# Altium PCB main.PcbDoc (part 9 of 16)
Units mil, origin at the board's own origin, x right, y up, seen from the top; angles counter-clockwise.
Board outline 8394.75 x 5164.44 mil, 7 copper layers (Top Layer 1, Layer 2, Layer 3, Unused, Layer 4_pow, Layer 5_gnd, Bottom 6+gnd), stack 64.043 mil thick; 364 components, 409 nets, 1932 pads, 1061 vias.
Unrouted connection lines stored in the file: 2.
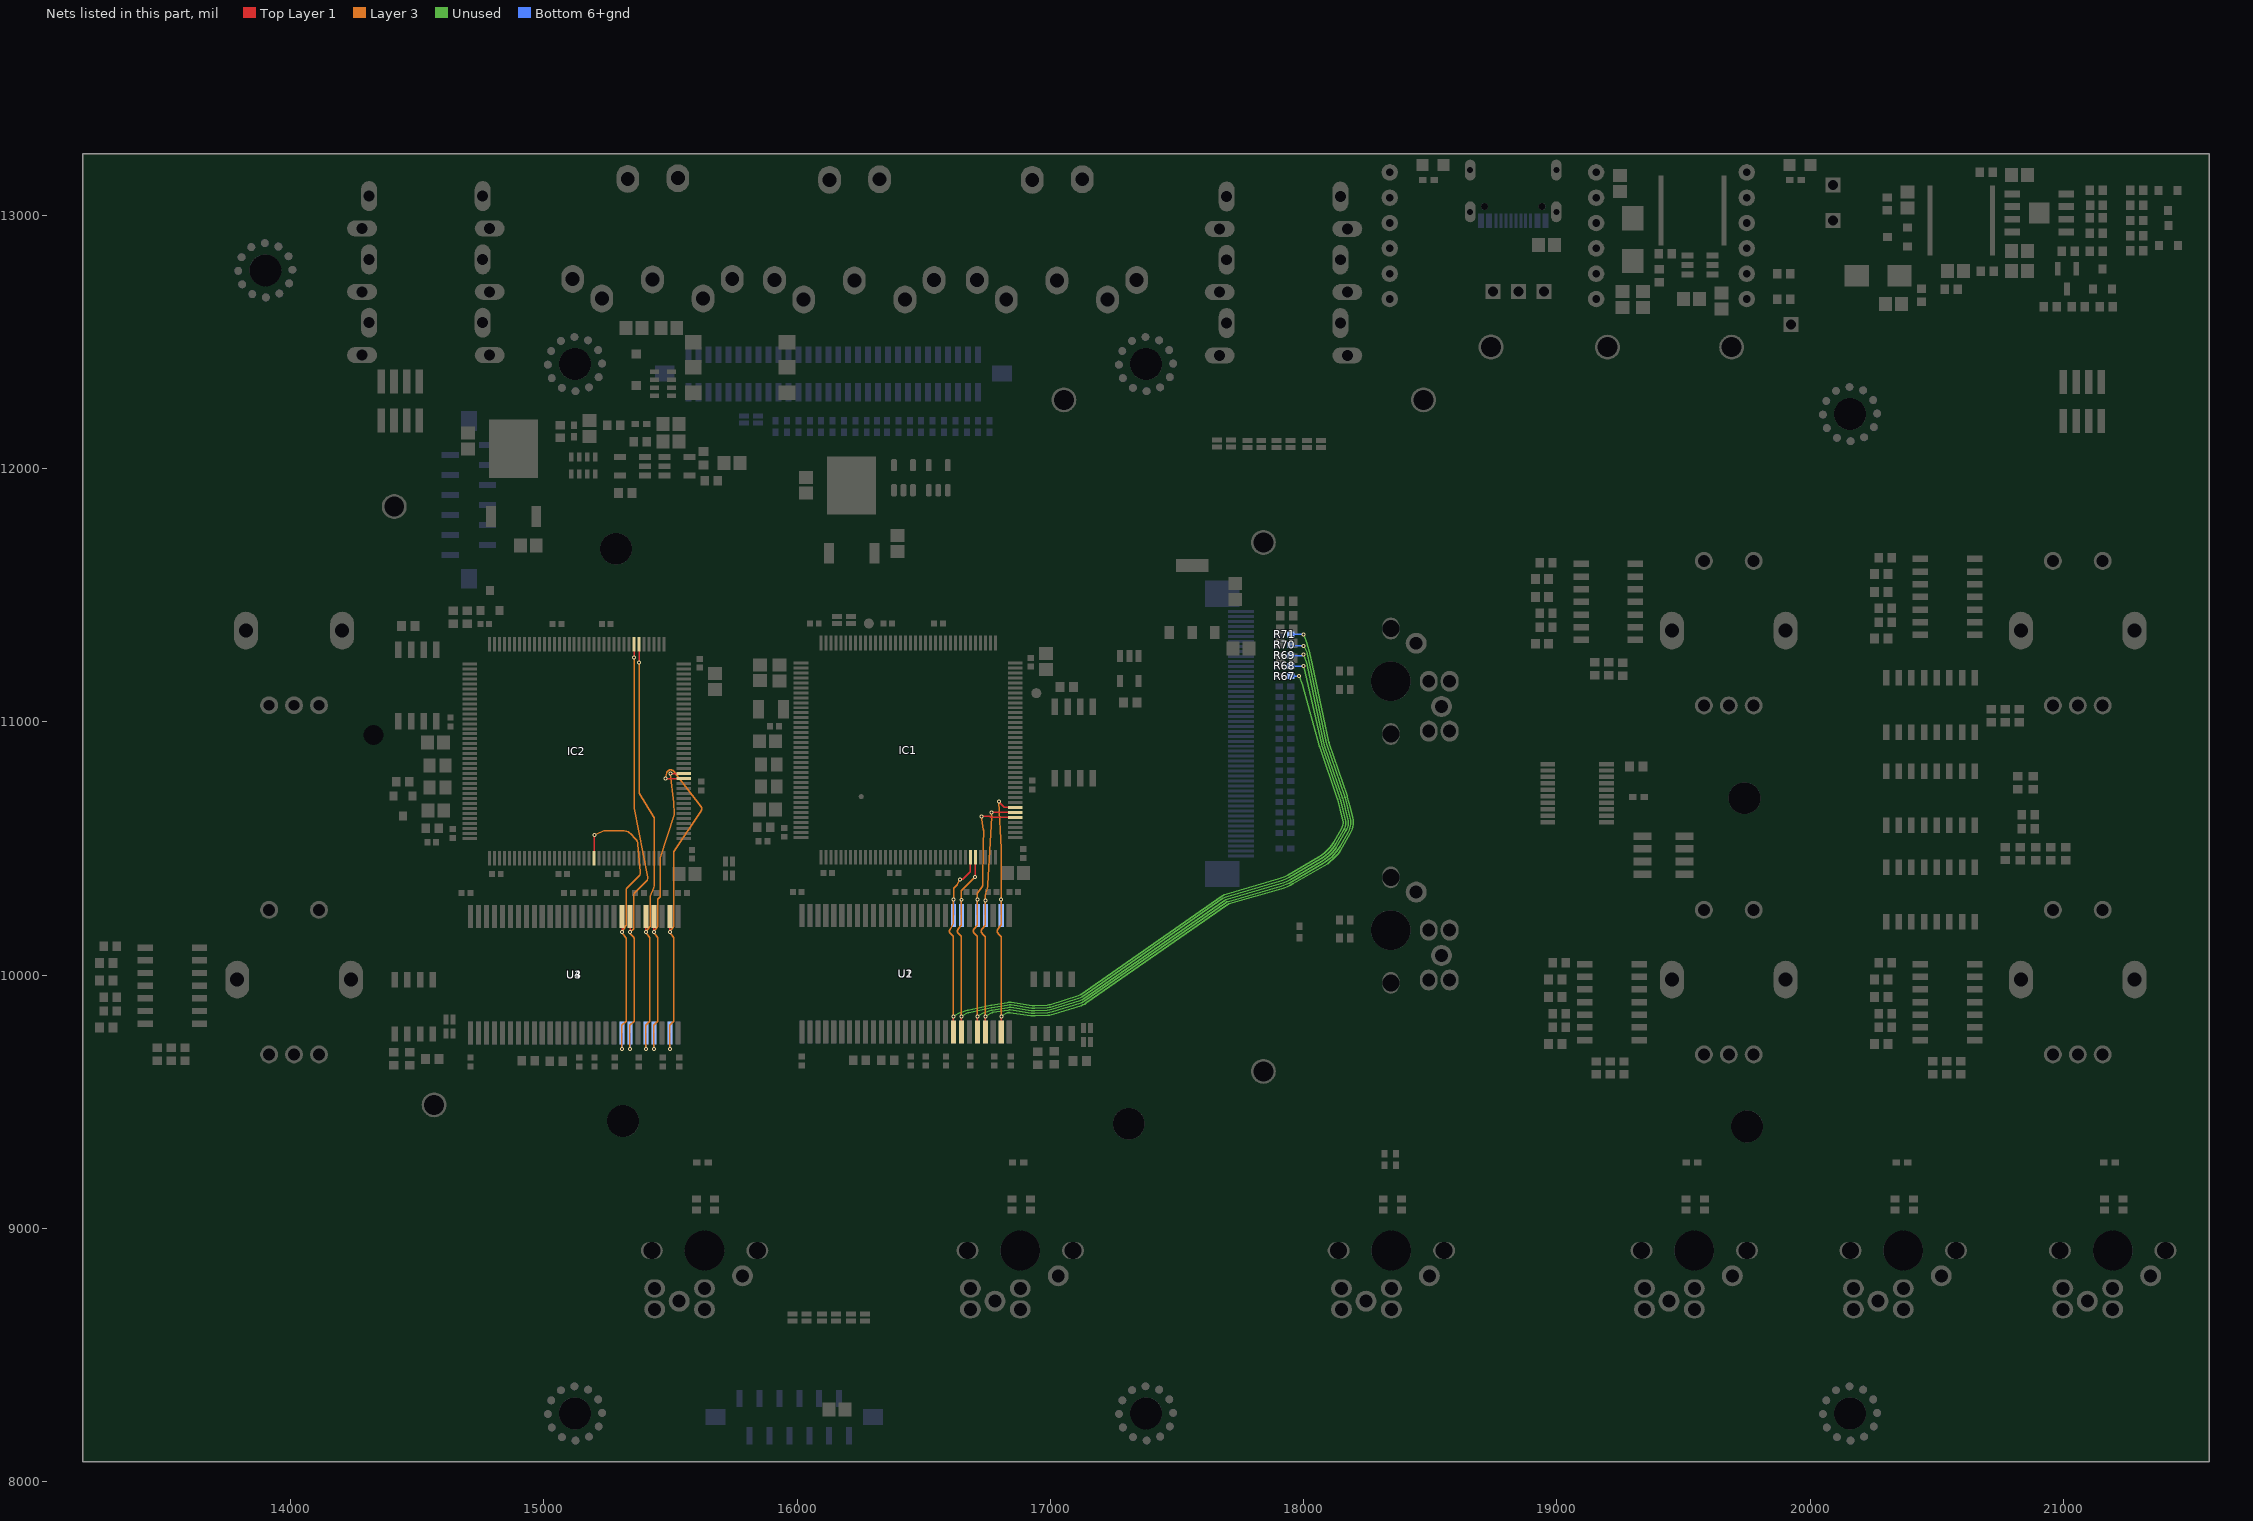
[diagram p12: the nets of this part, all layers, seen from the top]

## Via types
v1: diameter 15.75, hole 7.87, Top Layer 1 to Bottom 6+gnd, tented both sides, 961 vias
v2: diameter 27.56, hole 11.81, Top Layer 1 to Bottom 6+gnd, 45 vias
v3: diameter 23.62/23.62/23.62/23.62/23.62/23.62/23.62 (per signal layer), hole 12, Top Layer 1 to Bottom 6+gnd, tented top, 42 vias
v4: diameter 15.75, hole 7.87, Top Layer 1 to Bottom 6+gnd, 10 vias
v5: diameter 23.62/23.62/23.62/23.62/23.62/23.62/23.62 (per signal layer), hole 12, Top Layer 1 to Bottom 6+gnd, tented bottom, 3 vias

## Nets (pads, with @x,y where several pads share a name; then routed paths per layer and width w, separated by ;. In a path a pad name is that pad's centre, name@x,y a point inside that pad or via, vN(x,y) a via of type N, cw(c..) or ccw(c..) an arc to the next point about the centre after c; other vN are vias at no path point) (continued)
D11: IC1.67 R67.2 U1.47 U2.47 | length 3725.4
  Top Layer 1 w5: U1.47@16617.13,9775.59 16617.37,9818.09 v1(16617.37,9837.68) ; v1(16643.15,10378.82) 16653.55,10378.82 16684.21,10409.48 IC1.67@16684.21,10466.06
  Unused w5: v1(16617.37,9837.68) 16618.85,9839.15 cw(c16622.37,9835.6) 16620.07,9840.04 16641.76,9851.31 cw(c16648.87,9837.68) 16643.99,9852.26 16672.31,9861.74 cw(c16680.36,9837.68) 16675.04,9862.48 16765.25,9882.02 cw(c16774.85,9837.68) 16767.65,9882.48 16829.02,9892.34 cw(c16837.84,9837.68) 16846.13,9892.43 16928.12,9879.84 ccw(c16935.11,9924.67) 16937.4,9879.35 16987.49,9881.89 ccw(c16985.24,9927.2) 16998.61,9883.85 17109.14,9918.14 ccw(c17098.03,9953.96) 17119.43,9923.16 17675.87,10311.29 cw(c17710.04,10262.58) 17693.51,10319.73 17902.31,10380.15 ccw(c17859.4,10529.09) 17937.38,10395.13 18061.88,10467.79 ccw(c17983.57,10601.98) 18118.33,10524.65 18149.88,10579.6 ccw(c18110.55,10602.23) 18154.66,10612.87 18144.91,10653.24 ccw(c18100.81,10642.59) 18144.73,10653.98 18134.52,10693.19 ccw(c18090.6,10681.8) 18133.46,10696.69 18063.26,10901.68 cw(c18141.73,10928.53) 18061.72,10906.72 17997.29,11143.07 ccw(c17982.46,11139.03) 17996.74,11144.72 v1(17982.46,11180.61)
  Layer 3 w5: v1(16617.37,9837.68) 16617.37,10149.87 ; 16631.93,10357.37 v1(16643.15,10378.82) ; 16603.9,10182.37 ccw(c16616.88,10174.13) 16606.03,10163.24 ; 16603.9,10182.37 ccw(c16616.88,10174.13) 16606.03,10163.24 ; 16603.9,10182.37 ccw(c16616.88,10174.13) 16606.03,10163.24 ; 16603.9,10182.37 ccw(c16616.88,10174.13) 16606.03,10163.24 ; 16603.9,10182.37 ccw(c16616.88,10174.13) 16606.03,10163.24 ; 16603.9,10182.37 ccw(c16616.88,10174.13) 16606.03,10163.24 ; 16603.9,10182.37 ccw(c16616.88,10174.13) 16606.03,10163.24 ; 16603.9,10182.37 ccw(c16616.88,10174.13) 16606.03,10163.24 ; 16603.9,10182.37 ccw(c16616.88,10174.13) 16606.03,10163.24 ; 16603.9,10182.37 ccw(c16616.88,10174.13) 16606.03,10163.24 ; 16603.9,10182.37 ccw(c16616.88,10174.13) 16606.03,10163.24 ; 16603.9,10182.37 ccw(c16616.88,10174.13) 16606.03,10163.24 ; 16603.9,10182.37 ccw(c16616.88,10174.13) 16606.03,10163.24 ; 16603.9,10182.37 ccw(c16616.88,10174.13) 16606.03,10163.24 ; 16603.9,10182.37 ccw(c16616.88,10174.13) 16606.03,10163.24 ; 16603.9,10182.37 ccw(c16616.88,10174.13) 16606.03,10163.24 ; 16603.9,10182.37 16616.6,10202.39 ; 16606.03,10163.24 16615.92,10153.31 ; 16615.92,10153.31 cw(c16612.37,10149.78) 16617.37,10149.87 ; 16615.92,10153.31 cw(c16612.37,10149.78) 16617.37,10149.87 ; 16615.92,10153.31 cw(c16612.37,10149.78) 16617.37,10149.87 ; 16615.92,10153.31 cw(c16612.37,10149.78) 16617.37,10149.87 ; 16615.92,10153.31 cw(c16612.37,10149.78) 16617.37,10149.87 ; 16615.92,10153.31 cw(c16612.37,10149.78) 16617.37,10149.87 ; 16615.92,10153.31 cw(c16612.37,10149.78) 16617.37,10149.87 ; 16615.92,10153.31 cw(c16612.37,10149.78) 16617.37,10149.87 ; 16615.92,10153.31 cw(c16612.37,10149.78) 16617.37,10149.87 ; 16615.92,10153.31 cw(c16612.37,10149.78) 16617.37,10149.87 ; 16615.92,10153.31 cw(c16612.37,10149.78) 16617.37,10149.87 ; 16615.92,10153.31 cw(c16612.37,10149.78) 16617.37,10149.87 ; 16615.92,10153.31 cw(c16612.37,10149.78) 16617.37,10149.87 ; 16615.92,10153.31 cw(c16612.37,10149.78) 16617.37,10149.87 ; 16615.92,10153.31 cw(c16612.37,10149.78) 16617.37,10149.87 ; 16615.92,10153.31 cw(c16612.37,10149.78) 16617.37,10149.87 ; 16616.59,10202.39 ccw(c16612.37,10205.07) 16617.37,10204.98 ; 16616.59,10202.39 ccw(c16612.37,10205.07) 16617.37,10204.98 ; 16616.59,10202.39 ccw(c16612.37,10205.07) 16617.37,10204.98 ; 16616.59,10202.39 ccw(c16612.37,10205.07) 16617.37,10204.98 ; 16616.59,10202.39 ccw(c16612.37,10205.07) 16617.37,10204.98 ; 16617.37,10204.98 16617.37,10297.78 v1(16617.88,10298.28) 16617.88,10340.27 ; 16617.88,10340.27 cw(c16622.88,10340.27) 16619.32,10343.78 ; 16617.88,10340.27 cw(c16622.88,10340.27) 16619.32,10343.78 ; 16617.88,10340.27 cw(c16622.88,10340.27) 16619.32,10343.78 ; 16617.88,10340.27 cw(c16622.88,10340.27) 16619.32,10343.78 ; 16617.88,10340.27 cw(c16622.88,10340.27) 16619.32,10343.78 ; 16617.88,10340.27 cw(c16622.88,10340.27) 16619.32,10343.78 ; 16617.88,10340.27 cw(c16622.88,10340.27) 16619.32,10343.78 ; 16617.88,10340.27 cw(c16622.88,10340.27) 16619.32,10343.78 ; 16617.88,10340.27 cw(c16622.88,10340.27) 16619.32,10343.78 ; 16617.88,10340.27 cw(c16622.88,10340.27) 16619.32,10343.78 ; 16617.88,10340.27 cw(c16622.88,10340.27) 16619.32,10343.78 ; 16617.88,10340.27 cw(c16622.88,10340.27) 16619.32,10343.78 ; 16617.88,10340.27 cw(c16622.88,10340.27) 16619.32,10343.78 ; 16617.88,10340.27 cw(c16622.88,10340.27) 16619.32,10343.78 ; 16617.88,10340.27 cw(c16622.88,10340.27) 16619.32,10343.78 ; 16617.88,10340.27 cw(c16622.88,10340.27) 16619.32,10343.78 ; 16619.32,10343.78 16629.19,10353.65 ; 16629.19,10353.65 ccw(c16618.3,10364.5) 16631.92,10357.37 ; 16629.19,10353.65 ccw(c16618.3,10364.5) 16631.92,10357.37 ; 16629.19,10353.65 ccw(c16618.3,10364.5) 16631.92,10357.37 ; 16629.19,10353.65 ccw(c16618.3,10364.5) 16631.92,10357.37 ; 16629.19,10353.65 ccw(c16618.3,10364.5) 16631.92,10357.37 ; 16629.19,10353.65 ccw(c16618.3,10364.5) 16631.92,10357.37 ; 16629.19,10353.65 ccw(c16618.3,10364.5) 16631.92,10357.37 ; 16629.19,10353.65 ccw(c16618.3,10364.5) 16631.92,10357.37 ; 16629.19,10353.65 ccw(c16618.3,10364.5) 16631.92,10357.37 ; 16629.19,10353.65 ccw(c16618.3,10364.5) 16631.92,10357.37 ; 16629.19,10353.65 ccw(c16618.3,10364.5) 16631.92,10357.37 ; 16629.19,10353.65 ccw(c16618.3,10364.5) 16631.92,10357.37 ; 16629.19,10353.65 ccw(c16618.3,10364.5) 16631.92,10357.37 ; 16629.19,10353.65 ccw(c16618.3,10364.5) 16631.92,10357.37 ; 16629.19,10353.65 ccw(c16618.3,10364.5) 16631.92,10357.37 ; 16629.19,10353.65 ccw(c16618.3,10364.5) 16631.92,10357.37
  Bottom 6+gnd w5: U2.47@16617.13,10236.22 16617.88,10236.97 v1(16617.88,10298.28) ; R67.2@17948.43,11180.61 v1(17982.46,11180.61)
D12: IC1.68 R68.2 U1.48 U2.48 | length 3532
  Top Layer 1 w5: U1.48@16648.62,9775.59 16648.87,9818.09 v1(16648.87,9837.68) ; v1(16703.15,10388.82) 16703.52,10389.19 16703.52,10465.37 IC1.68@16703.78,10465.63
  Unused w5: v1(16648.87,9837.68) 16650.58,9839.17 cw(c16653.87,9835.4) 16651.52,9839.82 16673.14,9851.25 16673.25,9851.31 cw(c16680.36,9837.68) 16677.11,9852.7 16767.33,9872.24 cw(c16774.85,9837.68) 16769.24,9872.6 16830.64,9882.48 cw(c16837.84,9837.68) 16844.77,9882.52 16926.6,9869.95 ccw(c16935.11,9924.67) 16937.91,9869.37 16988,9871.9 ccw(c16985.24,9927.2) 17001.6,9874.31 17112.11,9908.59 ccw(c17098.03,9953.96) 17125.22,9915.01 17681.54,10303.05 cw(c17710.04,10262.58) 17696.28,10310.13 17905.13,10370.55 ccw(c17859.4,10529.09) 17942.42,10386.5 18066.92,10459.15 ccw(c17983.57,10601.98) 18127.01,10519.68 18158.55,10574.61 ccw(c18110.55,10602.23) 18164.38,10615.22 18154.63,10655.59 ccw(c18100.81,10642.59) 18154.41,10656.5 18144.19,10695.75 ccw(c18090.6,10681.8) 18142.92,10699.92 18072.71,10904.95 cw(c18141.73,10928.53) 18070.66,10912.15 v1(17999.57,11220.71)
  Layer 3 w5: v1(16648.87,9837.68) 16648.87,10149.83 ; v1(16703.15,10388.82) 16649.82,10335.49 ; 16636.86,10184.32 ccw(c16648.38,10174.13) 16637.5,10163.26 ; 16636.86,10184.32 ccw(c16648.38,10174.13) 16637.5,10163.26 ; 16636.86,10184.32 ccw(c16648.38,10174.13) 16637.51,10163.26 ; 16636.86,10184.32 ccw(c16648.38,10174.13) 16637.51,10163.26 ; 16636.86,10184.32 ccw(c16648.38,10174.13) 16637.51,10163.26 ; 16636.86,10184.32 ccw(c16648.38,10174.13) 16637.51,10163.26 ; 16636.86,10184.32 16647.61,10196.48 ; 16637.51,10163.26 16647.4,10153.36 ; 16647.4,10153.36 cw(c16643.87,10149.83) 16648.87,10149.86 ; 16647.4,10153.36 cw(c16643.87,10149.83) 16648.87,10149.86 ; 16647.4,10153.36 cw(c16643.87,10149.83) 16648.87,10149.86 ; 16647.4,10153.36 cw(c16643.87,10149.83) 16648.87,10149.86 ; 16647.4,10153.36 cw(c16643.87,10149.83) 16648.87,10149.86 ; 16647.4,10153.36 cw(c16643.87,10149.83) 16648.87,10149.86 ; 16647.4,10153.36 cw(c16643.87,10149.83) 16648.87,10149.86 ; 16647.4,10153.36 cw(c16643.87,10149.83) 16648.87,10149.86 ; 16647.4,10153.36 cw(c16643.87,10149.83) 16648.87,10149.86 ; 16647.4,10153.36 cw(c16643.87,10149.83) 16648.87,10149.86 ; 16647.4,10153.36 cw(c16643.87,10149.83) 16648.87,10149.86 ; 16647.4,10153.36 cw(c16643.87,10149.83) 16648.87,10149.86 ; 16647.4,10153.36 cw(c16643.87,10149.83) 16648.87,10149.86 ; 16647.4,10153.36 cw(c16643.87,10149.83) 16648.87,10149.86 ; 16647.4,10153.36 cw(c16643.87,10149.83) 16648.87,10149.86 ; 16647.4,10153.36 cw(c16643.87,10149.83) 16648.87,10149.86 ; 16647.61,10196.48 ccw(c16643.87,10199.79) 16648.87,10199.7 ; 16647.61,10196.48 ccw(c16643.87,10199.79) 16648.87,10199.7 ; 16647.61,10196.48 ccw(c16643.87,10199.79) 16648.87,10199.7 ; 16647.61,10196.48 ccw(c16643.87,10199.79) 16648.87,10199.7 ; 16647.61,10196.48 ccw(c16643.87,10199.79) 16648.87,10199.7 ; 16647.61,10196.48 ccw(c16643.87,10199.79) 16648.87,10199.7 ; 16647.61,10196.48 ccw(c16643.87,10199.79) 16648.87,10199.7 ; 16647.61,10196.48 ccw(c16643.87,10199.79) 16648.87,10199.7 ; 16647.61,10196.48 ccw(c16643.87,10199.79) 16648.87,10199.7 ; 16647.61,10196.48 ccw(c16643.87,10199.79) 16648.87,10199.7 ; 16647.61,10196.48 ccw(c16643.87,10199.79) 16648.87,10199.7 ; 16647.61,10196.48 ccw(c16643.87,10199.79) 16648.87,10199.7 ; 16647.61,10196.48 ccw(c16643.87,10199.79) 16648.87,10199.7 ; 16647.61,10196.48 ccw(c16643.87,10199.79) 16648.87,10199.7 ; 16647.61,10196.48 ccw(c16643.87,10199.79) 16648.87,10199.7 ; 16647.61,10196.48 ccw(c16643.87,10199.79) 16648.87,10199.7 ; 16648.38,10331.97 cw(c16653.38,10331.97) 16649.82,10335.49 ; 16648.38,10331.97 cw(c16653.38,10331.97) 16649.82,10335.49 ; 16648.38,10331.97 cw(c16653.38,10331.97) 16649.82,10335.49 ; 16648.38,10331.97 cw(c16653.38,10331.97) 16649.82,10335.49 ; 16648.38,10331.97 cw(c16653.38,10331.97) 16649.82,10335.49 ; 16648.38,10331.97 cw(c16653.38,10331.97) 16649.82,10335.49 ; 16648.38,10331.97 cw(c16653.38,10331.97) 16649.82,10335.49 ; 16648.38,10331.97 cw(c16653.38,10331.97) 16649.82,10335.49 ; 16648.38,10331.97 cw(c16653.38,10331.97) 16649.82,10335.49 ; 16648.38,10331.97 cw(c16653.38,10331.97) 16649.82,10335.49 ; 16648.38,10331.97 cw(c16653.38,10331.97) 16649.82,10335.49 ; 16648.38,10331.97 cw(c16653.38,10331.97) 16649.82,10335.49 ; 16648.38,10331.97 cw(c16653.38,10331.97) 16649.82,10335.49 ; 16648.38,10331.97 cw(c16653.38,10331.97) 16649.82,10335.49 ; 16648.38,10331.97 cw(c16653.38,10331.97) 16649.82,10335.49 ; 16648.38,10331.97 cw(c16653.38,10331.97) 16649.82,10335.49 ; 16648.38,10331.97 16648.38,10298.31 v1(16648.63,10298.06) 16648.87,10297.82 16648.87,10199.7
  Bottom 6+gnd w5: U2.48@16648.62,10236.22 v1(16648.63,10298.06) ; R68.2@17947.32,11220.81 17948.42,11220.8 17960.69,11220.71 v1(17999.57,11220.71)
D13: IC1.77 R69.2 U1.50 U2.50 | length 3878.8
  Top Layer 1 w5: U1.50@16711.86,9775.83 16711.86,9818.09 v1(16711.86,9837.68) ; v1(16727.71,10626.89) 16761.65,10626.89 16765.47,10623.07 IC1.77@16860.91,10623.07
  Unused w5: v1(16711.86,9837.68) 16713.44,9839.18 cw(c16716.86,9835.53) 16714.54,9839.96 16736.27,9851.32 cw(c16743.36,9837.68) 16738.48,9852.25 16766.8,9861.74 cw(c16774.85,9837.68) 16770.85,9862.73 16832.23,9872.6 cw(c16837.84,9837.68) 16843.28,9872.63 16925.1,9860.07 ccw(c16935.11,9924.67) 16938.41,9859.38 16988.5,9861.91 ccw(c16985.24,9927.2) 17004.57,9864.75 17115.07,9899.04 ccw(c17098.03,9953.96) 17130.92,9906.79 17687.26,10294.84 cw(c17710.04,10262.58) 17699.06,10300.52 17907.95,10360.96 ccw(c17859.4,10529.09) 17947.46,10377.86 18071.96,10450.52 ccw(c17983.57,10601.98) 18135.65,10514.66 18167.22,10569.63 ccw(c18110.55,10602.23) 18174.1,10617.57 18164.37,10657.89 ccw(c18100.81,10642.59) 18164.08,10659.04 18153.86,10698.27 ccw(c18090.6,10681.8) 18152.39,10703.14 18082.18,10908.16 cw(c18141.73,10928.53) 18080.17,10915.44 18014.62,11223.83 ccw(c17999.57,11220.71) 18014.02,11225.96 v1(17999.57,11265.71)
  Layer 3 w5: 16700.47,10163.29 cw(c16711.37,10174.13) 16699.85,10184.31 16710.61,10196.48 ; 16700.48,10163.28 16710.4,10153.31 ; v1(16711.86,9837.68) 16711.86,10149.87 ; v1(16727.71,10626.89) 16731.7,10602.04 ; 16731.7,10602 16735.97,10574.16 ; 16735.61,10516.87 16733.52,10358.62 ; 16735.61,10516.89 16736.26,10570 ; 16710.4,10153.31 cw(c16706.86,10149.78) 16711.86,10149.87 ; 16710.4,10153.31 cw(c16706.86,10149.78) 16711.86,10149.87 ; 16710.4,10153.31 cw(c16706.86,10149.78) 16711.86,10149.87 ; 16710.4,10153.31 cw(c16706.86,10149.78) 16711.86,10149.87 ; 16710.4,10153.31 cw(c16706.86,10149.78) 16711.86,10149.87 ; 16710.4,10153.31 cw(c16706.86,10149.78) 16711.86,10149.87 ; 16710.4,10153.31 cw(c16706.86,10149.78) 16711.86,10149.87 ; 16710.4,10153.31 cw(c16706.86,10149.78) 16711.86,10149.87 ; 16710.4,10153.31 cw(c16706.86,10149.78) 16711.86,10149.87 ; 16710.4,10153.31 cw(c16706.86,10149.78) 16711.86,10149.87 ; 16710.4,10153.31 cw(c16706.86,10149.78) 16711.86,10149.87 ; 16710.4,10153.31 cw(c16706.86,10149.78) 16711.86,10149.87 ; 16710.4,10153.31 cw(c16706.86,10149.78) 16711.86,10149.87 ; 16710.4,10153.31 cw(c16706.86,10149.78) 16711.86,10149.87 ; 16710.4,10153.31 cw(c16706.86,10149.78) 16711.86,10149.87 ; 16710.4,10153.31 cw(c16706.86,10149.78) 16711.86,10149.87 ; 16710.61,10196.48 ccw(c16706.86,10199.79) 16711.86,10199.7 ; 16710.61,10196.48 ccw(c16706.86,10199.79) 16711.86,10199.7 ; 16710.61,10196.48 ccw(c16706.86,10199.79) 16711.86,10199.7 ; 16710.61,10196.48 ccw(c16706.86,10199.79) 16711.86,10199.7 ; 16710.61,10196.48 ccw(c16706.86,10199.79) 16711.86,10199.7 ; 16710.61,10196.48 ccw(c16706.86,10199.79) 16711.86,10199.7 ; 16710.61,10196.48 ccw(c16706.86,10199.79) 16711.86,10199.7 ; 16710.61,10196.48 ccw(c16706.86,10199.79) 16711.86,10199.7 ; 16710.61,10196.48 ccw(c16706.86,10199.79) 16711.86,10199.7 ; 16710.61,10196.48 ccw(c16706.86,10199.79) 16711.86,10199.7 ; 16710.61,10196.48 ccw(c16706.86,10199.79) 16711.86,10199.7 ; 16710.61,10196.48 ccw(c16706.86,10199.79) 16711.86,10199.7 ; 16710.61,10196.48 ccw(c16706.86,10199.79) 16711.86,10199.7 ; 16710.61,10196.48 ccw(c16706.86,10199.79) 16711.86,10199.7 ; 16710.61,10196.48 ccw(c16706.86,10199.79) 16711.86,10199.7 ; 16710.61,10196.48 ccw(c16706.86,10199.79) 16711.86,10199.7 ; 16711.37,10319.97 cw(c16716.37,10319.97) 16712.24,10322.78 ; 16711.37,10319.97 cw(c16716.37,10319.97) 16712.24,10322.78 ; 16711.37,10319.97 cw(c16716.37,10319.97) 16712.24,10322.78 ; 16711.37,10319.97 cw(c16716.37,10319.97) 16712.24,10322.78 ; 16711.37,10319.97 cw(c16716.37,10319.97) 16712.24,10322.78 ; 16711.37,10319.97 cw(c16716.37,10319.97) 16712.24,10322.78 ; 16711.37,10319.97 cw(c16716.37,10319.97) 16712.24,10322.78 ; 16711.37,10319.97 cw(c16716.37,10319.97) 16712.24,10322.78 ; 16711.37,10319.97 cw(c16716.37,10319.97) 16712.24,10322.78 ; 16711.37,10319.97 cw(c16716.37,10319.97) 16712.24,10322.78 ; 16711.37,10319.97 cw(c16716.37,10319.97) 16712.24,10322.78 ; 16711.37,10319.97 cw(c16716.37,10319.97) 16712.24,10322.78 ; 16711.37,10319.97 cw(c16716.37,10319.97) 16712.24,10322.78 ; 16711.37,10319.97 cw(c16716.37,10319.97) 16712.24,10322.78 ; 16711.37,10319.97 cw(c16716.37,10319.97) 16712.24,10322.78 ; 16711.37,10319.97 cw(c16716.37,10319.97) 16712.24,10322.78 ; 16711.37,10319.97 v1(16711.37,10298.31) 16711.86,10297.82 16711.86,10199.7 ; 16712.24,10322.78 16730.86,10350.17 ; 16730.86,10350.17 ccw(c16718.15,10358.82) 16733.52,10358.62 ; 16730.86,10350.17 ccw(c16718.15,10358.82) 16733.52,10358.62 ; 16730.86,10350.17 ccw(c16718.15,10358.82) 16733.52,10358.62 ; 16730.86,10350.17 ccw(c16718.15,10358.82) 16733.52,10358.62 ; 16730.86,10350.17 ccw(c16718.15,10358.82) 16733.52,10358.62 ; 16730.86,10350.17 ccw(c16718.15,10358.82) 16733.52,10358.62 ; 16730.86,10350.17 ccw(c16718.15,10358.82) 16733.52,10358.62 ; 16730.86,10350.17 ccw(c16718.15,10358.82) 16733.52,10358.62 ; 16730.86,10350.17 ccw(c16718.15,10358.82) 16733.52,10358.62 ; 16730.86,10350.17 ccw(c16718.15,10358.82) 16733.52,10358.62 ; 16730.86,10350.17 ccw(c16718.15,10358.82) 16733.52,10358.62 ; 16730.86,10350.17 ccw(c16718.15,10358.82) 16733.52,10358.62 ; 16730.86,10350.17 ccw(c16718.15,10358.82) 16733.52,10358.62 ; 16730.86,10350.17 ccw(c16718.15,10358.82) 16733.52,10358.62 ; 16730.86,10350.17 ccw(c16718.15,10358.82) 16733.52,10358.62 ; 16730.86,10350.17 ccw(c16718.15,10358.82) 16733.52,10358.62 ; 16735.97,10574.16 cw(c16710.89,10570.31) 16736.26,10570 ; 16735.97,10574.16 cw(c16710.89,10570.31) 16736.26,10570 ; 16735.97,10574.16 cw(c16710.89,10570.31) 16736.26,10570 ; 16735.97,10574.16 cw(c16710.89,10570.31) 16736.26,10570 ; 16735.97,10574.16 cw(c16710.89,10570.31) 16736.26,10570 ; 16735.97,10574.16 cw(c16710.89,10570.31) 16736.26,10570 ; 16735.97,10574.16 cw(c16710.89,10570.31) 16736.26,10570 ; 16735.97,10574.16 cw(c16710.89,10570.31) 16736.26,10570 ; 16735.97,10574.16 cw(c16710.89,10570.31) 16736.26,10570 ; 16735.97,10574.16 cw(c16710.89,10570.31) 16736.26,10570 ; 16735.97,10574.16 cw(c16710.89,10570.31) 16736.26,10570 ; 16735.97,10574.16 cw(c16710.89,10570.31) 16736.26,10570 ; 16735.97,10574.16 cw(c16710.89,10570.31) 16736.26,10570 ; 16735.97,10574.16 cw(c16710.89,10570.31) 16736.26,10570 ; 16735.97,10574.16 cw(c16710.89,10570.31) 16736.26,10570 ; 16735.97,10574.16 cw(c16710.89,10570.31) 16736.26,10570
  Bottom 6+gnd w5: U2.50@16711.61,10236.22 v1@16711.61,10298.06 ; R69.2@17947.32,11262.13 17993.08,11262.13 17996.66,11265.71 v1(17999.57,11265.71)
D14: IC1.78 R70.2 U1.51 U2.51 | length 3508.4
  Top Layer 1 w5: U1.51@16743.36,9775.83 v1(16743.36,9837.68) ; v1(16767.21,10643.47) 16767.57,10643.11 16834.37,10643.11 16834.37,10643.46 IC1.78@16860.75,10642.6
  Unused w5: v1(16743.36,9837.68) 16744.94,9839.18 cw(c16748.36,9835.53) 16746.04,9839.96 16767.76,9851.31 cw(c16774.85,9837.68) 16772.47,9852.87 16833.82,9862.73 cw(c16837.84,9837.68) 16841.77,9862.74 16923.61,9850.18 ccw(c16935.11,9924.67) 16938.92,9849.39 16989.04,9851.93 ccw(c16985.24,9927.2) 17007.53,9855.2 17118.03,9889.49 ccw(c17098.03,9953.96) 17136.62,9898.57 17693.31,10286.87 cw(c17710.04,10262.58) 17701.84,10290.92 17910.77,10351.36 ccw(c17859.4,10529.09) 17952.5,10369.22 18077,10441.88 ccw(c17983.57,10601.98) 18144.33,10509.68 18175.89,10564.65 ccw(c18110.55,10602.23) 18183.82,10619.91 18174.09,10660.23 ccw(c18100.81,10642.59) 18173.76,10661.54 18163.54,10700.79 ccw(c18090.6,10681.8) 18161.87,10706.33 18091.65,10911.38 cw(c18141.73,10928.53) 18089.95,10917.52 18024.4,11225.93 ccw(c17999.57,11220.71) 18024.31,11226.35 18014.56,11269.13 ccw(c17999.57,11265.71) 18013.38,11272.46 v1(17999.57,11300.71)
  Layer 3 w5: v1(16743.36,9837.68) 16743.36,10149.87 ccw(c16738.36,10149.78) 16741.9,10153.31 16731.97,10163.28 cw(c16742.87,10174.13) 16731.34,10184.31 16742.1,10196.48 ccw(c16738.36,10199.79) 16743.36,10199.7 v1(16743.36,10294.41) 16743.36,10315.33 cw(c16748.36,10315.33) 16743.52,10316.61 16752.33,10349.72 ccw(c16718.15,10358.82) 16753.46,10356.77 16769.03,10625.55 16769.03,10625.6 ccw(c16764.03,10625.81) 16769,10626.34 v1(16767.21,10643.47)
  Bottom 6+gnd w5: U2.51@16743.11,10236.22 16743.36,10236.47 v1(16743.36,10294.41) ; R70.2@17950.25,11300.71 v1(17999.57,11300.71)
D15: IC1.79 R71.2 U1.53 U2.53 | length 3643.4
  Top Layer 1 w5: v1(16796.99,10685.43) 16796.99,10684.05 16818.44,10662.59 16860.76,10662.59 IC1.79@16860.91,10662.44 ; U1.53@16806.1,9775.59 16806.35,9818.09 v1(16806.35,9837.68)
  Unused w5: v1(16806.35,9837.68) 16807.83,9839.15 cw(c16811.35,9835.6) 16809.04,9840.04 16830.73,9851.31 cw(c16837.84,9837.68) 16840.25,9852.86 16922.13,9840.29 ccw(c16935.11,9924.67) 16939.4,9839.4 16989.55,9841.94 ccw(c16985.24,9927.2) 17010.48,9845.65 17121,9879.94 ccw(c17098.03,9953.96) 17142.34,9890.37 17699.02,10278.66 cw(c17710.04,10262.58) 17704.62,10281.31 17913.6,10341.77 ccw(c17859.4,10529.09) 17957.54,10360.59 18082.04,10433.24 ccw(c17983.57,10601.98) 18153,10504.7 18184.56,10559.67 ccw(c18110.55,10602.23) 18193.54,10622.26 18183.81,10662.58 ccw(c18100.81,10642.59) 18183.44,10664.05 18173.22,10703.31 ccw(c18090.6,10681.8) 18171.37,10709.46 18101.11,10914.62 cw(c18141.73,10928.53) 18099.73,10919.6 18034.17,11228.06 ccw(c17999.57,11220.71) 18034.06,11228.57 18024.31,11271.35 ccw(c17999.57,11265.71) 18023.88,11272.96 18014.3,11305.1 ccw(c17999.57,11300.71) 18014.02,11305.96 v1(17999.57,11345.71)
  Layer 3 w5: v1(16796.99,10685.43) 16805.85,10499.02 ; v1(16806.35,9837.68) 16806.35,10149.87 ; 16804.89,10153.31 cw(c16801.35,10149.78) 16806.35,10149.87 ; 16804.89,10153.31 cw(c16801.35,10149.78) 16806.35,10149.87 ; 16804.89,10153.31 cw(c16801.35,10149.78) 16806.35,10149.87 ; 16804.89,10153.31 cw(c16801.35,10149.78) 16806.35,10149.87 ; 16804.89,10153.31 cw(c16801.35,10149.78) 16806.35,10149.87 ; 16804.89,10153.31 cw(c16801.35,10149.78) 16806.35,10149.87 ; 16804.89,10153.31 cw(c16801.35,10149.78) 16806.35,10149.87 ; 16804.89,10153.31 cw(c16801.35,10149.78) 16806.35,10149.87 ; 16804.89,10153.31 cw(c16801.35,10149.78) 16806.35,10149.87 ; 16804.89,10153.31 cw(c16801.35,10149.78) 16806.35,10149.87 ; 16804.89,10153.31 cw(c16801.35,10149.78) 16806.35,10149.87 ; 16804.89,10153.31 cw(c16801.35,10149.78) 16806.35,10149.87 ; 16804.89,10153.31 cw(c16801.35,10149.78) 16806.35,10149.87 ; 16804.89,10153.31 cw(c16801.35,10149.78) 16806.35,10149.87 ; 16804.89,10153.31 cw(c16801.35,10149.78) 16806.35,10149.87 ; 16804.89,10153.31 cw(c16801.35,10149.78) 16806.35,10149.87 ; 16804.89,10153.31 16794.96,10163.28 cw(c16805.86,10174.13) 16794.33,10184.31 16805.09,10196.48 ; 16805.09,10196.48 ccw(c16801.35,10199.79) 16806.35,10199.7 ; 16805.09,10196.48 ccw(c16801.35,10199.79) 16806.35,10199.7 ; 16805.09,10196.48 ccw(c16801.35,10199.79) 16806.35,10199.7 ; 16805.09,10196.48 ccw(c16801.35,10199.79) 16806.35,10199.7 ; 16805.09,10196.48 ccw(c16801.35,10199.79) 16806.35,10199.7 ; 16805.09,10196.48 ccw(c16801.35,10199.79) 16806.35,10199.7 ; 16805.09,10196.48 ccw(c16801.35,10199.79) 16806.35,10199.7 ; 16805.09,10196.48 ccw(c16801.35,10199.79) 16806.35,10199.7 ; 16805.09,10196.48 ccw(c16801.35,10199.79) 16806.35,10199.7 ; 16805.09,10196.48 ccw(c16801.35,10199.79) 16806.35,10199.7 ; 16805.09,10196.48 ccw(c16801.35,10199.79) 16806.35,10199.7 ; 16805.09,10196.48 ccw(c16801.35,10199.79) 16806.35,10199.7 ; 16805.09,10196.48 ccw(c16801.35,10199.79) 16806.35,10199.7 ; 16805.09,10196.48 ccw(c16801.35,10199.79) 16806.35,10199.7 ; 16805.09,10196.48 ccw(c16801.35,10199.79) 16806.35,10199.7 ; 16805.09,10196.48 ccw(c16801.35,10199.79) 16806.35,10199.7 ; 16805.86,10498.88 ccw(c16800.86,10498.79) 16805.85,10499.02 ; 16805.86,10498.88 ccw(c16800.86,10498.79) 16805.85,10499.02 ; 16805.86,10498.88 ccw(c16800.86,10498.79) 16805.85,10499.02 ; 16805.86,10498.88 ccw(c16800.86,10498.79) 16805.85,10499.02 ; 16805.86,10498.88 ccw(c16800.86,10498.79) 16805.85,10499.02 ; 16805.86,10498.88 v1(16805.86,10298.31) 16806.35,10297.82 16806.35,10199.7
  Bottom 6+gnd w5: U2.53@16806.1,10236.22 v1@16806.1,10298.06 ; R71.2@17948.26,11345.71 v1(17999.57,11345.71)
DD0: IC2.85 U3.2 U4.2 | length 1485.8
  Top Layer 1 w5: v1@15480.01,10776.36 IC2.85@15552.61,10776.36 ; v1@15497.8,10170.19 U3.2@15497.8,10232.03
  Layer 3 w5: v1(15479.93,10776.28) 15484.91,10798.95 cw(c15499.93,10795.65) 15512.02,10805.15 15620.18,10667.36 cw(c15608.09,10657.87) 15620.89,10649.35 15513.79,10488.43 ccw(c15517.95,10485.66) 15512.95,10485.66 15512.95,10196.31 ; v1(15497.56,9709.31) 15497.56,9803 15513.68,9819.12 15513.68,10145.78 ; 15512.95,10196.27 cw(c15507.95,10196.36) 15512.13,10193.61 15498.38,10172.69 ccw(c15502.56,10169.94) 15497.56,10170 v1(15497.56,10169.94) ccw(c15502.56,10169.94) 15498.61,10166.87 15512.63,10148.8 ; 15512.63,10148.8 cw(c15508.68,10145.74) 15513.68,10145.83 ; 15512.63,10148.8 cw(c15508.68,10145.74) 15513.68,10145.83 ; 15512.63,10148.8 cw(c15508.68,10145.74) 15513.68,10145.83 ; 15512.63,10148.8 cw(c15508.68,10145.74) 15513.68,10145.83 ; 15512.63,10148.8 cw(c15508.68,10145.74) 15513.68,10145.83 ; 15512.63,10148.8 cw(c15508.68,10145.74) 15513.68,10145.83 ; 15512.63,10148.8 cw(c15508.68,10145.74) 15513.68,10145.83 ; 15512.63,10148.8 cw(c15508.68,10145.74) 15513.68,10145.83 ; 15512.63,10148.8 cw(c15508.68,10145.74) 15513.68,10145.83 ; 15512.63,10148.8 cw(c15508.68,10145.74) 15513.68,10145.83 ; 15512.63,10148.8 cw(c15508.68,10145.74) 15513.68,10145.83 ; 15512.63,10148.8 cw(c15508.68,10145.74) 15513.68,10145.83 ; 15512.63,10148.8 cw(c15508.68,10145.74) 15513.68,10145.83 ; 15512.63,10148.8 cw(c15508.68,10145.74) 15513.68,10145.83 ; 15512.63,10148.8 cw(c15508.68,10145.74) 15513.68,10145.83 ; 15512.63,10148.8 cw(c15508.68,10145.74) 15513.68,10145.83
  Bottom 6+gnd w5: v1@15497.8,9709.56 U4.2@15497.8,9771.4
DD1: IC2.86 U3.4 U4.4 | length 1485.1
  Top Layer 1 w5: v1@15434.81,10170.19 U3.4@15434.81,10232.03 ; v1@15500.16,10795.89 IC2.86@15552.45,10795.89
  Layer 3 w5: v1(15434.57,9709.31) 15434.57,9803 15450.69,9819.12 15450.69,10145.78 ; v1(15434.57,10169.94) ccw(c15439.57,10169.94) 15435.62,10166.88 15449.64,10148.8 ; v1@15435.41,10172.73 ccw(c15439.57,10169.94) v1(15434.57,10169.94) ; 15450.69,10197.05 15450.69,10300.48 15458.39,10308.18 ; v1(15499.93,10795.65) 15513.42,10680.61 cw(c15498.15,10678.82) 15513.51,10679.49 15515.29,10638.84 cw(c15499.93,10638.17) 15514.56,10633.47 15460.11,10463.98 ccw(c15464.88,10462.47) 15459.88,10462.5 15459.82,10311.69 ; v1(15434.57,10169.94) cw(c15439.57,10169.94) v1@15435.41,10172.72 ; v1(15434.57,10169.94) cw(c15439.57,10169.94) v1@15435.41,10172.72 ; v1(15434.57,10169.94) cw(c15439.57,10169.94) v1@15435.41,10172.72 ; v1(15434.57,10169.94) cw(c15439.57,10169.94) v1@15435.41,10172.72 ; v1(15434.57,10169.94) cw(c15439.57,10169.94) v1@15435.41,10172.72 ; v1(15434.57,10169.94) cw(c15439.57,10169.94) v1@15435.41,10172.72 ; v1(15434.57,10169.94) cw(c15439.57,10169.94) v1@15435.41,10172.72 ; v1(15434.57,10169.94) cw(c15439.57,10169.94) v1@15435.41,10172.72 ; v1(15434.57,10169.94) cw(c15439.57,10169.94) v1@15435.41,10172.72 ; v1(15434.57,10169.94) cw(c15439.57,10169.94) v1@15435.41,10172.72 ; v1(15434.57,10169.94) cw(c15439.57,10169.94) v1@15435.41,10172.72 ; v1(15434.57,10169.94) cw(c15439.57,10169.94) v1@15435.41,10172.72 ; v1(15434.57,10169.94) cw(c15439.57,10169.94) v1@15435.41,10172.72 ; v1(15434.57,10169.94) cw(c15439.57,10169.94) v1@15435.41,10172.72 ; v1(15434.57,10169.94) cw(c15439.57,10169.94) v1@15435.41,10172.72 ; v1@15435.41,10172.72 15449.85,10194.31 ; 15449.64,10148.8 cw(c15445.69,10145.74) 15450.69,10145.83 ; 15449.64,10148.8 cw(c15445.69,10145.74) 15450.69,10145.83 ; 15449.64,10148.8 cw(c15445.69,10145.74) 15450.69,10145.83 ; 15449.64,10148.8 cw(c15445.69,10145.74) 15450.69,10145.83 ; 15449.64,10148.8 cw(c15445.69,10145.74) 15450.69,10145.83 ; 15449.64,10148.8 cw(c15445.69,10145.74) 15450.69,10145.83 ; 15449.64,10148.8 cw(c15445.69,10145.74) 15450.69,10145.83 ; 15449.64,10148.8 cw(c15445.69,10145.74) 15450.69,10145.83 ; 15449.64,10148.8 cw(c15445.69,10145.74) 15450.69,10145.83 ; 15449.64,10148.8 cw(c15445.69,10145.74) 15450.69,10145.83 ; 15449.64,10148.8 cw(c15445.69,10145.74) 15450.69,10145.83 ; 15449.64,10148.8 cw(c15445.69,10145.74) 15450.69,10145.83 ; 15449.64,10148.8 cw(c15445.69,10145.74) 15450.69,10145.83 ; 15449.64,10148.8 cw(c15445.69,10145.74) 15450.69,10145.83 ; 15449.64,10148.8 cw(c15445.69,10145.74) 15450.69,10145.83 ; 15449.64,10148.8 cw(c15445.69,10145.74) 15450.69,10145.83 ; 15449.85,10194.32 ccw(c15445.69,10197.09) 15450.69,10197 ; 15449.85,10194.32 ccw(c15445.69,10197.09) 15450.69,10197 ; 15449.85,10194.32 ccw(c15445.69,10197.09) 15450.69,10197 ; 15449.85,10194.32 ccw(c15445.69,10197.09) 15450.69,10197 ; 15449.85,10194.32 ccw(c15445.69,10197.09) 15450.69,10197 ; 15449.85,10194.32 ccw(c15445.69,10197.09) 15450.69,10197 ; 15449.85,10194.32 ccw(c15445.69,10197.09) 15450.69,10197 ; 15449.85,10194.32 ccw(c15445.69,10197.09) 15450.69,10197 ; 15449.85,10194.32 ccw(c15445.69,10197.09) 15450.69,10197 ; 15449.85,10194.32 ccw(c15445.69,10197.09) 15450.69,10197 ; 15449.85,10194.32 ccw(c15445.69,10197.09) 15450.69,10197 ; 15449.85,10194.32 ccw(c15445.69,10197.09) 15450.69,10197 ; 15449.85,10194.32 ccw(c15445.69,10197.09) 15450.69,10197 ; 15449.85,10194.32 ccw(c15445.69,10197.09) 15450.69,10197 ; 15449.85,10194.32 ccw(c15445.69,10197.09) 15450.69,10197 ; 15449.84,10194.31 ccw(c15445.69,10197.09) 15450.69,10197 ; 15458.41,10308.2 ccw(c15454.82,10311.69) 15459.82,10311.69 ; 15458.41,10308.2 ccw(c15454.82,10311.69) 15459.82,10311.69 ; 15458.41,10308.2 ccw(c15454.82,10311.69) 15459.82,10311.69 ; 15458.41,10308.2 ccw(c15454.82,10311.69) 15459.82,10311.69 ; 15458.41,10308.2 ccw(c15454.82,10311.69) 15459.82,10311.69 ; 15458.41,10308.2 ccw(c15454.82,10311.69) 15459.82,10311.69 ; 15458.41,10308.2 ccw(c15454.82,10311.69) 15459.82,10311.69 ; 15458.41,10308.2 ccw(c15454.82,10311.69) 15459.82,10311.69 ; 15458.41,10308.2 ccw(c15454.82,10311.69) 15459.82,10311.69 ; 15458.41,10308.2 ccw(c15454.82,10311.69) 15459.82,10311.69 ; 15458.41,10308.2 ccw(c15454.82,10311.69) 15459.82,10311.69 ; 15458.41,10308.2 ccw(c15454.82,10311.69) 15459.82,10311.69 ; 15458.41,10308.2 ccw(c15454.82,10311.69) 15459.82,10311.69 ; 15458.41,10308.2 ccw(c15454.82,10311.69) 15459.82,10311.69 ; 15458.41,10308.2 ccw(c15454.82,10311.69) 15459.82,10311.69 ; 15458.41,10308.2 ccw(c15454.82,10311.69) 15459.82,10311.69
  Bottom 6+gnd w5: v1@15434.81,9709.56 U4.4@15434.81,9771.4
DD2: IC2.114 U3.5 U4.5 | length 2000.5
  Top Layer 1 w5: v1@15375.91,11234.79 IC2.114@15375.91,11307.38 ; v1@15403.31,10170.19 U3.5@15403.31,10232.03
  Layer 3 w5: v1(15375.99,11234.71) 15375.99,10720.56 ccw(c15380.99,10720.56) 15376.75,10717.91 15432.87,10627.81 15432.91,10627.75 cw(c15419.85,10619.63) 15435.22,10619.63 15435.22,10354.63 ; v1(15403.07,9709.31) 15403.07,9803 15419.19,9819.12 15419.19,10145.78 ; v1(15403.07,10169.94) ccw(c15408.07,10169.94) 15404.12,10166.88 15418.14,10148.8 ; v1(15403.07,10169.94) cw(c15408.07,10169.94) 15404.16,10173.06 15418.6,10191.26 ; 15418.14,10148.8 cw(c15414.19,10145.74) 15419.19,10145.83 ; 15418.14,10148.8 cw(c15414.19,10145.74) 15419.19,10145.83 ; 15418.14,10148.8 cw(c15414.19,10145.74) 15419.19,10145.83 ; 15418.14,10148.8 cw(c15414.19,10145.74) 15419.19,10145.83 ; 15418.14,10148.8 cw(c15414.19,10145.74) 15419.19,10145.83 ; 15418.14,10148.8 cw(c15414.19,10145.74) 15419.19,10145.83 ; 15418.14,10148.8 cw(c15414.19,10145.74) 15419.19,10145.83 ; 15418.14,10148.8 cw(c15414.19,10145.74) 15419.19,10145.83 ; 15418.14,10148.8 cw(c15414.19,10145.74) 15419.19,10145.83 ; 15418.14,10148.8 cw(c15414.19,10145.74) 15419.19,10145.83 ; 15418.14,10148.8 cw(c15414.19,10145.74) 15419.19,10145.83 ; 15418.14,10148.8 cw(c15414.19,10145.74) 15419.19,10145.83 ; 15418.14,10148.8 cw(c15414.19,10145.74) 15419.19,10145.83 ; 15418.14,10148.8 cw(c15414.19,10145.74) 15419.19,10145.83 ; 15418.14,10148.8 cw(c15414.19,10145.74) 15419.19,10145.83 ; 15418.14,10148.8 cw(c15414.19,10145.74) 15419.19,10145.83 ; 15418.6,10191.26 ccw(c15414.68,10194.37) 15419.68,10194.28 ; 15418.6,10191.26 ccw(c15414.68,10194.37) 15419.68,10194.28 ; 15418.6,10191.26 ccw(c15414.68,10194.37) 15419.68,10194.28 ; 15418.6,10191.26 ccw(c15414.68,10194.37) 15419.68,10194.28 ; 15418.6,10191.26 ccw(c15414.68,10194.37) 15419.68,10194.28 ; 15418.6,10191.26 ccw(c15414.68,10194.37) 15419.68,10194.28 ; 15418.6,10191.26 ccw(c15414.68,10194.37) 15419.68,10194.28 ; 15418.6,10191.26 ccw(c15414.68,10194.37) 15419.68,10194.28 ; 15418.6,10191.26 ccw(c15414.68,10194.37) 15419.68,10194.28 ; 15418.6,10191.26 ccw(c15414.68,10194.37) 15419.68,10194.28 ; 15418.6,10191.26 ccw(c15414.68,10194.37) 15419.68,10194.28 ; 15418.6,10191.26 ccw(c15414.68,10194.37) 15419.68,10194.28 ; 15418.6,10191.26 ccw(c15414.68,10194.37) 15419.68,10194.28 ; 15418.6,10191.26 ccw(c15414.68,10194.37) 15419.68,10194.28 ; 15418.6,10191.26 ccw(c15414.68,10194.37) 15419.68,10194.28 ; 15418.6,10191.26 ccw(c15414.68,10194.37) 15419.68,10194.28 ; 15419.68,10194.32 15419.68,10309.9 cw(c15424.68,10309.91) 15420.04,10311.76 15433.41,10345.21 ; 15433.41,10345.21 ccw(c15409.85,10354.63) 15435.22,10354.63 ; 15433.41,10345.21 ccw(c15409.85,10354.63) 15435.22,10354.63 ; 15433.41,10345.21 ccw(c15409.85,10354.63) 15435.22,10354.63 ; 15433.41,10345.21 ccw(c15409.85,10354.63) 15435.22,10354.63 ; 15433.41,10345.21 ccw(c15409.85,10354.63) 15435.22,10354.63 ; 15433.41,10345.21 ccw(c15409.85,10354.63) 15435.22,10354.63 ; 15433.41,10345.21 ccw(c15409.85,10354.63) 15435.22,10354.63 ; 15433.41,10345.21 ccw(c15409.85,10354.63) 15435.22,10354.63 ; 15433.41,10345.21 ccw(c15409.85,10354.63) 15435.22,10354.63 ; 15433.41,10345.21 ccw(c15409.85,10354.63) 15435.22,10354.63 ; 15433.41,10345.21 ccw(c15409.85,10354.63) 15435.22,10354.63 ; 15433.41,10345.21 ccw(c15409.85,10354.63) 15435.22,10354.63 ; 15433.41,10345.21 ccw(c15409.85,10354.63) 15435.22,10354.63 ; 15433.41,10345.21 ccw(c15409.85,10354.63) 15435.22,10354.63 ; 15433.41,10345.21 ccw(c15409.85,10354.63) 15435.22,10354.63 ; 15433.41,10345.21 ccw(c15409.85,10354.63) 15435.22,10354.63
  Bottom 6+gnd w5: v1@15403.31,9709.56 U4.5@15403.31,9771.4
DD3: IC2.115 U3.7 U4.7 | length 1873.2
  Top Layer 1 w5: v1@15340.32,10170.19 U3.7@15340.32,10232.03 ; v1@15356.39,11254.94 IC2.115@15356.39,11307.23
  Layer 3 w5: v1(15340.08,9709.31) 15340.08,9803 15356.2,9819.12 15356.2,10145.78 ; 15355.7,10187.59 cw(c15350.7,10187.68) 15354.24,10184.15 v1(15340.08,10169.94) v1@15340.08,10167.87 ; 15355.7,10187.64 15355.7,10320.48 cw(c15360.7,10320.49) 15357.12,10323.97 15405.85,10373.89 ccw(c15394.85,10384.63) 15409.93,10387.61 15356.72,10658.97 cw(c15361.62,10659.93) 15356.62,10659.93 v1(15356.62,11254.71) ; v1@15340.08,10167.87 ccw(c15345.08,10167.88) v1@15341.32,10164.58 ; v1@15340.08,10167.87 ccw(c15345.08,10167.88) v1@15341.32,10164.58 ; v1@15340.08,10167.87 ccw(c15345.08,10167.88) v1@15341.32,10164.58 ; v1@15340.08,10167.87 ccw(c15345.08,10167.88) v1@15341.32,10164.58 ; v1@15340.08,10167.87 ccw(c15345.08,10167.88) v1@15341.32,10164.58 ; v1@15340.08,10167.87 ccw(c15345.08,10167.88) v1@15341.32,10164.58 ; v1@15340.08,10167.87 ccw(c15345.08,10167.88) v1@15341.32,10164.58 ; v1@15340.08,10167.87 ccw(c15345.08,10167.88) v1@15341.32,10164.58 ; v1@15340.08,10167.87 ccw(c15345.08,10167.88) v1@15341.32,10164.58 ; v1@15340.08,10167.87 ccw(c15345.08,10167.88) v1@15341.32,10164.58 ; v1@15340.08,10167.87 ccw(c15345.08,10167.88) v1@15341.32,10164.58 ; v1@15340.08,10167.87 ccw(c15345.08,10167.88) v1@15341.32,10164.58 ; v1@15340.08,10167.87 ccw(c15345.08,10167.88) v1@15341.32,10164.58 ; v1@15340.08,10167.87 ccw(c15345.08,10167.88) v1@15341.32,10164.58 ; v1@15340.08,10167.87 ccw(c15345.08,10167.88) v1@15341.32,10164.58 ; v1@15340.08,10167.87 ccw(c15345.08,10167.88) v1@15341.32,10164.58 ; v1@15341.32,10164.58 15354.96,10149.04 ; 15354.96,10149.04 cw(c15351.2,10145.74) 15356.2,10145.83 ; 15354.96,10149.04 cw(c15351.2,10145.74) 15356.2,10145.83 ; 15354.96,10149.04 cw(c15351.2,10145.74) 15356.2,10145.83 ; 15354.96,10149.04 cw(c15351.2,10145.74) 15356.2,10145.83 ; 15354.96,10149.04 cw(c15351.2,10145.74) 15356.2,10145.83 ; 15354.96,10149.04 cw(c15351.2,10145.74) 15356.2,10145.83 ; 15354.96,10149.04 cw(c15351.2,10145.74) 15356.2,10145.83 ; 15354.96,10149.04 cw(c15351.2,10145.74) 15356.2,10145.83 ; 15354.96,10149.04 cw(c15351.2,10145.74) 15356.2,10145.83 ; 15354.96,10149.04 cw(c15351.2,10145.74) 15356.2,10145.83 ; 15354.96,10149.04 cw(c15351.2,10145.74) 15356.2,10145.83 ; 15354.96,10149.04 cw(c15351.2,10145.74) 15356.2,10145.83 ; 15354.96,10149.04 cw(c15351.2,10145.74) 15356.2,10145.83 ; 15354.96,10149.04 cw(c15351.2,10145.74) 15356.2,10145.83 ; 15354.96,10149.04 cw(c15351.2,10145.74) 15356.2,10145.83 ; 15354.96,10149.04 cw(c15351.2,10145.74) 15356.2,10145.83
  Bottom 6+gnd w5: v1@15340.32,9709.56 U4.7@15340.32,9771.4
DD4: IC2.58 U3.8 U4.8 | length 2377.5
  Top Layer 1 w5: IC2.58@15198.91,10461.71 15199.3,10462.11 15199.3,10552.4 v1(15200.72,10553.82) ; v1@15308.83,10170.19 U3.8@15308.83,10232.03
  Layer 3 w5: v1(15200.72,10553.82) 15228.76,10567.45 ; v1(15308.58,9709.31) 15308.58,9803 15324.7,9819.12 15324.7,10145.78 ; 15324.95,10198.16 15324.95,10337.31 ; 15228.76,10567.45 cw(c15239.85,10544.63) 15239.93,10570 ; 15228.76,10567.45 cw(c15239.85,10544.63) 15239.93,10570 ; 15228.76,10567.45 cw(c15239.85,10544.63) 15239.93,10570 ; 15228.76,10567.45 cw(c15239.85,10544.63) 15239.93,10570 ; 15228.76,10567.45 cw(c15239.85,10544.63) 15239.93,10570 ; 15228.76,10567.45 cw(c15239.85,10544.63) 15239.93,10570 ; 15228.76,10567.45 cw(c15239.85,10544.63) 15239.93,10570 ; 15228.76,10567.45 cw(c15239.85,10544.63) 15239.93,10570 ; 15228.76,10567.45 cw(c15239.85,10544.63) 15239.93,10570 ; 15228.76,10567.45 cw(c15239.85,10544.63) 15239.93,10570 ; 15228.76,10567.45 cw(c15239.85,10544.63) 15239.93,10570 ; 15228.76,10567.45 cw(c15239.85,10544.63) 15239.93,10570 ; 15228.76,10567.45 cw(c15239.85,10544.63) 15239.93,10570 ; 15228.76,10567.45 cw(c15239.85,10544.63) 15239.93,10570 ; 15228.76,10567.45 cw(c15239.85,10544.63) 15239.93,10570 ; 15228.76,10567.45 cw(c15239.85,10544.63) 15239.93,10570 ; 15239.93,10570 15317.02,10569.77 ; 15317.02,10569.77 cw(c15316.94,10534.39) 15342.36,10558.99 ; 15317.02,10569.77 cw(c15316.94,10534.39) 15342.36,10558.99 ; 15317.02,10569.77 cw(c15316.94,10534.39) 15342.36,10558.99 ; 15317.02,10569.77 cw(c15316.94,10534.39) 15342.36,10558.99 ; 15317.02,10569.77 cw(c15316.94,10534.39) 15342.36,10558.99 ; 15317.02,10569.77 cw(c15316.94,10534.39) 15342.36,10558.99 ; 15317.02,10569.77 cw(c15316.94,10534.39) 15342.36,10558.99 ; 15317.02,10569.77 cw(c15316.94,10534.39) 15342.36,10558.99 ; 15317.02,10569.77 cw(c15316.94,10534.39) 15342.36,10558.99 ; 15317.02,10569.77 cw(c15316.94,10534.39) 15342.36,10558.99 ; 15317.02,10569.77 cw(c15316.94,10534.39) 15342.36,10558.99 ; 15317.02,10569.77 cw(c15316.94,10534.39) 15342.36,10558.99 ; 15317.02,10569.77 cw(c15316.94,10534.39) 15342.36,10558.99 ; 15317.02,10569.77 cw(c15316.94,10534.39) 15342.36,10558.99 ; 15317.02,10569.77 cw(c15316.94,10534.39) 15342.36,10558.99 ; 15317.02,10569.77 cw(c15316.94,10534.39) 15342.36,10558.99 ; 15323.65,10148.8 cw(c15319.7,10145.74) 15324.7,10145.83 ; 15323.65,10148.8 cw(c15319.7,10145.74) 15324.7,10145.83 ; 15323.65,10148.8 cw(c15319.7,10145.74) 15324.7,10145.83 ; 15323.65,10148.8 cw(c15319.7,10145.74) 15324.7,10145.83 ; 15323.65,10148.8 cw(c15319.7,10145.74) 15324.7,10145.83 ; 15323.65,10148.8 cw(c15319.7,10145.74) 15324.7,10145.83 ; 15323.65,10148.8 cw(c15319.7,10145.74) 15324.7,10145.83 ; 15323.65,10148.8 cw(c15319.7,10145.74) 15324.7,10145.83 ; 15323.65,10148.8 cw(c15319.7,10145.74) 15324.7,10145.83 ; 15323.65,10148.8 cw(c15319.7,10145.74) 15324.7,10145.83 ; 15323.65,10148.8 cw(c15319.7,10145.74) 15324.7,10145.83 ; 15323.65,10148.8 cw(c15319.7,10145.74) 15324.7,10145.83 ; 15323.65,10148.8 cw(c15319.7,10145.74) 15324.7,10145.83 ; 15323.65,10148.8 cw(c15319.7,10145.74) 15324.7,10145.83 ; 15323.65,10148.8 cw(c15319.7,10145.74) 15324.7,10145.83 ; 15323.65,10148.8 cw(c15319.7,10145.74) 15324.7,10145.83 ; 15323.65,10148.8 15309.64,10166.87 cw(c15313.58,10169.94) v1(15308.58,10169.94) 15308.58,10170 cw(c15313.58,10169.94) 15309.38,10172.66 15324.15,10195.49 ; 15324.15,10195.49 ccw(c15319.95,10198.21) 15324.95,10198.12 ; 15324.15,10195.49 ccw(c15319.95,10198.21) 15324.95,10198.12 ; 15324.15,10195.49 ccw(c15319.95,10198.21) 15324.95,10198.12 ; 15324.15,10195.49 ccw(c15319.95,10198.21) 15324.95,10198.12 ; 15324.15,10195.49 ccw(c15319.95,10198.21) 15324.95,10198.12 ; 15324.15,10195.49 ccw(c15319.95,10198.21) 15324.95,10198.12 ; 15324.15,10195.49 ccw(c15319.95,10198.21) 15324.95,10198.12 ; 15324.15,10195.49 ccw(c15319.95,10198.21) 15324.95,10198.12 ; 15324.15,10195.49 ccw(c15319.95,10198.21) 15324.95,10198.12 ; 15324.15,10195.49 ccw(c15319.95,10198.21) 15324.95,10198.12 ; 15324.15,10195.49 ccw(c15319.95,10198.21) 15324.95,10198.12 ; 15324.15,10195.49 ccw(c15319.95,10198.21) 15324.95,10198.12 ; 15324.15,10195.49 ccw(c15319.95,10198.21) 15324.95,10198.12 ; 15324.15,10195.49 ccw(c15319.95,10198.21) 15324.95,10198.12 ; 15324.15,10195.49 ccw(c15319.95,10198.21) 15324.95,10198.12 ; 15324.15,10195.49 ccw(c15319.95,10198.21) 15324.95,10198.12 ; 15324.95,10337.31 cw(c15329.95,10337.31) 15326.4,10340.82 ; 15324.95,10337.31 cw(c15329.95,10337.31) 15326.4,10340.82 ; 15324.95,10337.31 cw(c15329.95,10337.31) 15326.4,10340.82 ; 15324.95,10337.31 cw(c15329.95,10337.31) 15326.4,10340.82 ; 15324.95,10337.31 cw(c15329.95,10337.31) 15326.4,10340.82 ; 15324.95,10337.31 cw(c15329.95,10337.31) 15326.4,10340.82 ; 15324.95,10337.31 cw(c15329.95,10337.31) 15326.4,10340.82 ; 15324.95,10337.31 cw(c15329.95,10337.31) 15326.4,10340.82 ; 15324.95,10337.31 cw(c15329.95,10337.31) 15326.4,10340.82 ; 15324.95,10337.31 cw(c15329.95,10337.31) 15326.4,10340.82 ; 15324.95,10337.31 cw(c15329.95,10337.31) 15326.4,10340.82 ; 15324.95,10337.31 cw(c15329.95,10337.31) 15326.4,10340.82 ; 15324.95,10337.31 cw(c15329.95,10337.31) 15326.4,10340.82 ; 15324.95,10337.31 cw(c15329.95,10337.31) 15326.4,10340.82 ; 15324.95,10337.31 cw(c15329.95,10337.31) 15326.4,10340.82 ; 15324.95,10337.31 cw(c15329.95,10337.31) 15326.4,10340.82 ; 15326.4,10340.82 15327.98,10342.4 ; 15327.98,10342.4 ccw(c15310,10360.32) 15328.11,10342.53 ; 15327.98,10342.4 ccw(c15310,10360.32) 15328.11,10342.53 ; 15327.98,10342.4 ccw(c15310,10360.32) 15328.11,10342.53 ; 15327.98,10342.4 ccw(c15310,10360.32) 15328.11,10342.53 ; 15327.98,10342.4 ccw(c15310,10360.32) 15328.11,10342.53 ; 15327.98,10342.4 ccw(c15310,10360.32) 15328.11,10342.53 ; 15327.98,10342.4 ccw(c15310,10360.32) 15328.11,10342.53 ; 15327.98,10342.4 ccw(c15310,10360.32) 15328.11,10342.53 ; 15327.98,10342.4 ccw(c15310,10360.32) 15328.11,10342.53 ; 15327.98,10342.4 ccw(c15310,10360.32) 15328.11,10342.53 ; 15327.98,10342.4 ccw(c15310,10360.32) 15328.11,10342.53 ; 15327.98,10342.4 ccw(c15310,10360.32) 15328.11,10342.53 ; 15327.98,10342.4 ccw(c15310,10360.32) 15328.11,10342.53 ; 15327.98,10342.4 ccw(c15310,10360.32) 15328.11,10342.53 ; 15327.98,10342.4 ccw(c15310,10360.32) 15328.11,10342.53 ; 15327.98,10342.4 ccw(c15310,10360.32) 15328.11,10342.53 ; 15328.11,10342.53 15373.31,10388.55 ccw(c15355.21,10406.33) 15380.5,10408.4 15371.56,10517.28 ; 15342.36,10558.99 15361.68,10539.04 ; 15361.68,10539.04 cw(c15336.31,10514.39) 15371.56,10517.29 ; 15361.68,10539.04 cw(c15336.31,10514.39) 15371.56,10517.29 ; 15361.68,10539.04 cw(c15336.31,10514.39) 15371.56,10517.29 ; 15361.68,10539.04 cw(c15336.31,10514.39) 15371.56,10517.29 ; 15361.68,10539.04 cw(c15336.31,10514.39) 15371.56,10517.29 ; 15361.68,10539.04 cw(c15336.31,10514.39) 15371.56,10517.29 ; 15361.68,10539.04 cw(c15336.31,10514.39) 15371.56,10517.29 ; 15361.68,10539.04 cw(c15336.31,10514.39) 15371.56,10517.29 ; 15361.68,10539.04 cw(c15336.31,10514.39) 15371.56,10517.29 ; 15361.68,10539.04 cw(c15336.31,10514.39) 15371.56,10517.29 ; 15361.68,10539.04 cw(c15336.31,10514.39) 15371.56,10517.29 ; 15361.68,10539.04 cw(c15336.31,10514.39) 15371.56,10517.29 ; 15361.68,10539.04 cw(c15336.31,10514.39) 15371.56,10517.29 ; 15361.68,10539.04 cw(c15336.31,10514.39) 15371.56,10517.29 ; 15361.68,10539.04 cw(c15336.31,10514.39) 15371.56,10517.29 ; 15361.68,10539.04 cw(c15336.31,10514.39) 15371.56,10517.29
  Bottom 6+gnd w5: v1@15308.83,9709.56 U4.8@15308.83,9771.4